# EAGLE board Kitchen Light Driver 1.1 (EAGLE 6.2)
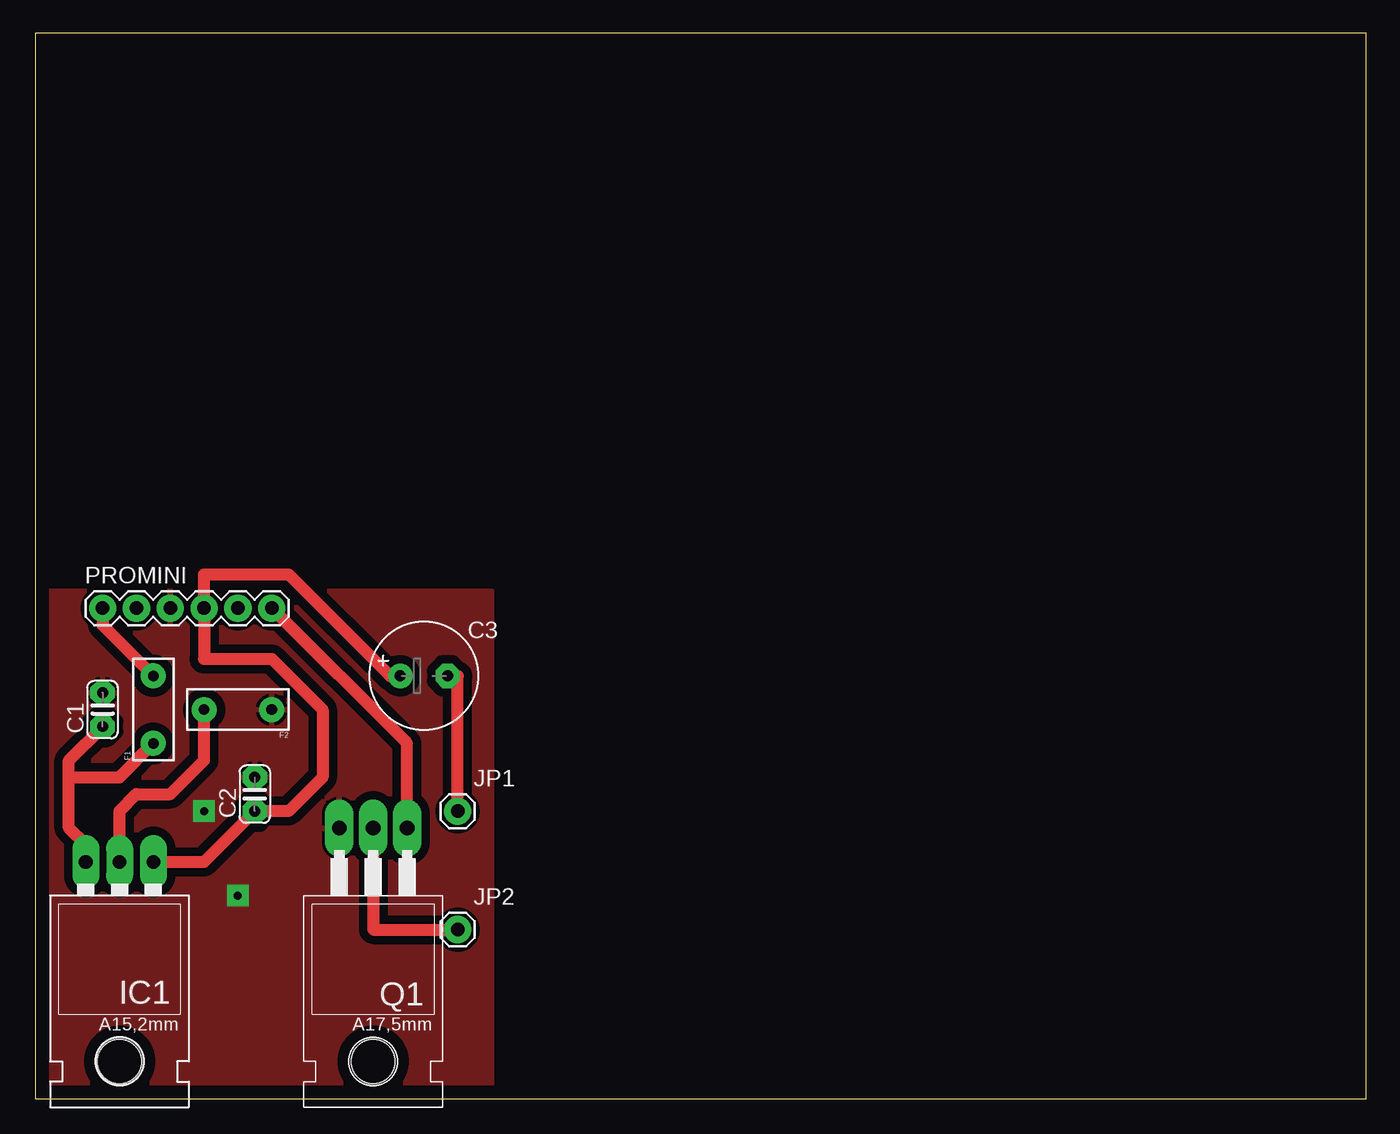
[diagram p0: board, top side]
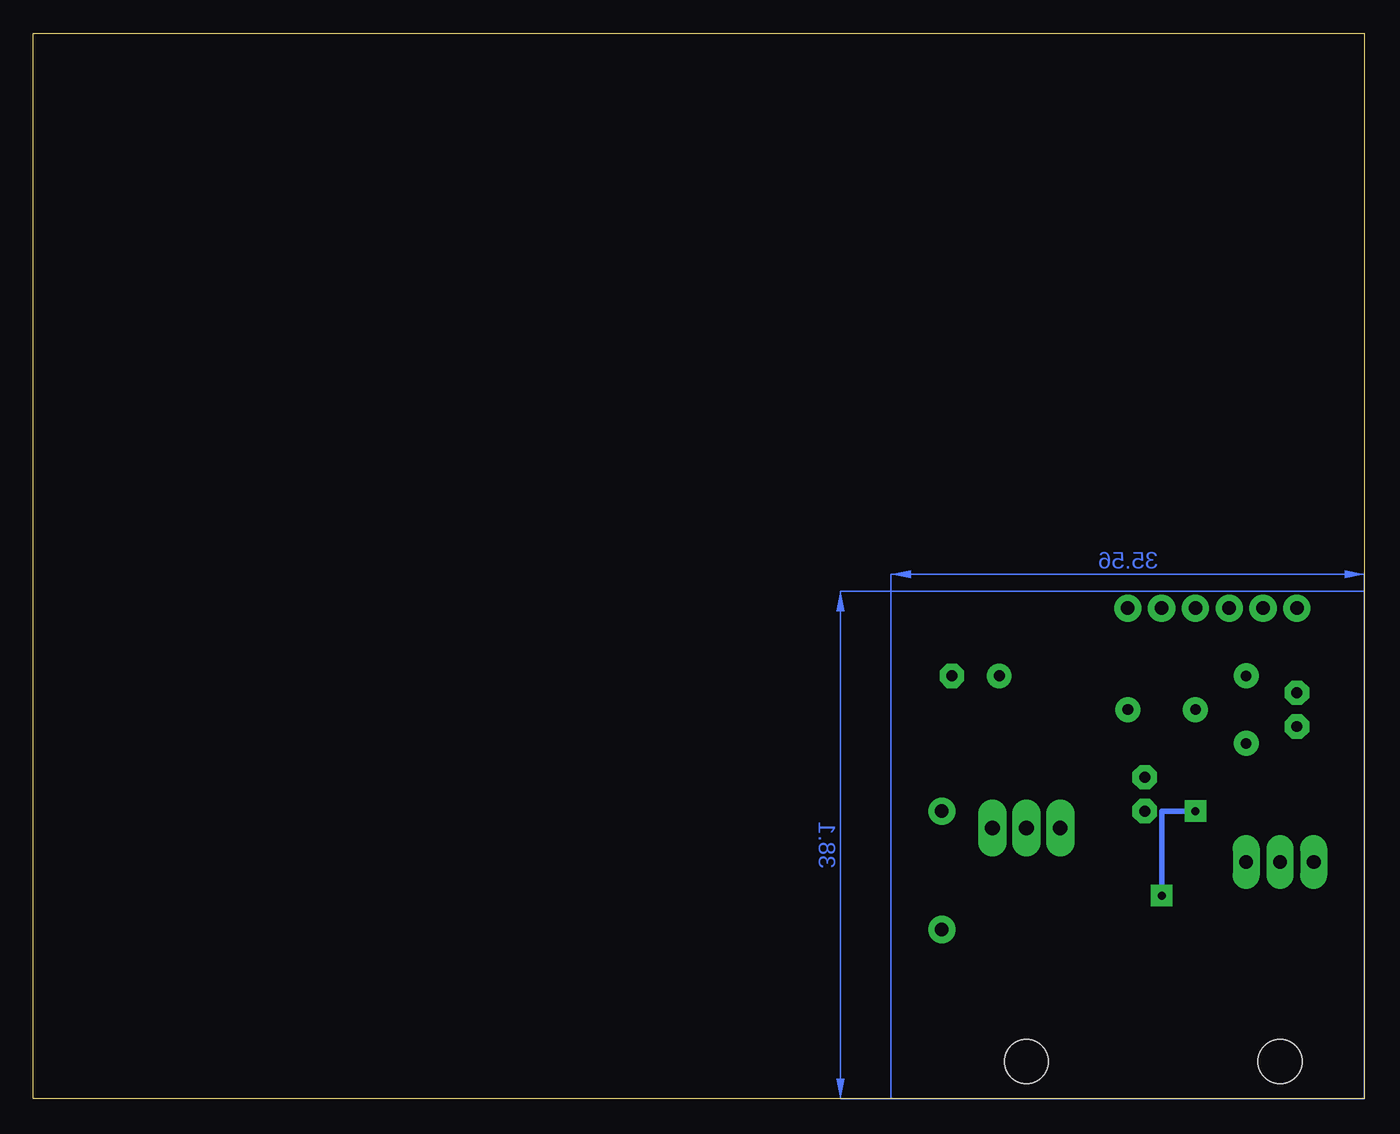
[diagram p1: board, bottom side, seen from below]

Size 100 x 80 mm. Coordinates in mm from the lower left corner, seen from the top.
Outline: 0,0 100,0 100,80 0,80 0,0
Copper layers (1*16): Top 0.035mm / dielectric 1.5mm / Bottom 0.035mm
Design rules: minimum track width 35mil, minimum drill 24mil, track to track 25mil, track to pad 25mil, pad to pad 25mil, via to via 25mil, smd to smd 25mil, copper to edge 40mil, drill to drill 8mil, minimum pad ring 10mil, minimum via ring 8mil, stop-mask expansion 4mil, vias tented up to drill 0mil, thermal gap 10mil

## Footprints (pad centres in the part's own frame; a part is rotated, then mirrored left to right if it is on the bottom)
C025-024X044 = drill 0.813 octagon: 1 -1.27,0; 2 1.27,0
E3,5-8 = drill 0.813 pad 1.6: + -1.778,0 | drill 0.813 pad 1.6 octagon: - 1.778,0
PTC = drill 0.8 pad 1.88: P$1 -2.54,0; P$2 2.54,0
78XXL = drill 1.016 long: GND 0,-3.81; IN -2.54,-3.81; OUT 2.54,-3.81 | hole 3.302: 0,11.176
1X01 = drill 1.016 pad 1.88: 1 0,0
1X06 = drill 1.016 pad 1.88: 1 0,0; 2 2.54,0; 3 5.08,0; 4 7.62,0; 5 10.16,0; 6 12.7,0
TO220 = drill 1.118 long: 1 -2.54,-6.35; 2 0,-6.35; 3 2.54,-6.35 | hole 3.302: 0,11.176

## Placement (x,y rotation side)
C1  [C025-024X044]  5.08,29.21 90 top
C2  [C025-024X044]  16.51,22.86 90 top
C3  [E3,5-8]  29.21,31.75 0 top
F1  PTCPTH  [PTC]  8.89,29.21 90 top
F2  PTCPTH  [PTC]  15.24,29.21 180 top
IC1  5v  [78XXL]  6.35,13.97 180 top
JP1  To Leds  [1X01]  31.75,21.59 0 top
JP2  From Leds  [1X01]  31.75,12.7 0 top
PROMINI  [1X06]  5.08,36.83 0 top
Q1  IRF540  [TO220]  25.4,13.97 180 top

## Library data of the parts
C1-C3 = resistor
F1 F2 JP1 JP2 PROMINI = SparkFun
IC1 = v-reg
Q1 = transistor-fet

## Nets
GND: C1.2 C2.2 F2.P$1 PROMINI.3 Q1.3
IRF540: PROMINI.6 Q1.1
N$1: C1.1 F1.P$1 IC1.OUT
N$2: F2.P$2 IC1.GND
N$3: F1.P$2 PROMINI.1
N$4: C3.- JP1.1
N$5: JP2.1 Q1.2
N$6: C2.1 C3.+ IC1.IN PROMINI.4

## Tracks (layer width: path | path; a pad name or v marks a point on that pad's centre or on a via)
GND  (via drill 0.6)
  Bottom 0.406: v12.7,21.59 15.24,21.59 v15.24,15.24
  pour Top: 0,38.1 0,0 34.29,0 34.29,38.1
IRF540
  Top 0.889: PROMINI.6 27.94,26.67 Q1.1
N$1
  Top 0.889: C1.1 2.54,25.4 2.54,24.13 | 2.54,24.13 2.54,20.32 3.81,19.05 IC1.OUT | F1.P$1 6.35,24.13 2.54,24.13
N$2
  Top 0.889: F2.P$2 12.7,25.4 10.16,22.86 7.62,22.86 6.35,21.59 IC1.GND
N$3
  Top 0.889: F1.P$2 5.08,35.56 PROMINI.1
N$4
  Top 0.889: JP1.1 31.75,31.75 C3.-
N$5
  Top 0.889: JP2.1 25.4,12.7 Q1.2
N$6
  Top 0.889: IC1.IN 12.7,17.78 C2.1 19.05,21.59 21.59,24.13 21.59,29.21 17.78,33.02 12.7,33.02 PROMINI.4 12.7,39.37 19.05,39.37 26.67,31.75 C3.+
(copper drawn outside any net)
  shapes: Bottom area x2